# EAGLE board Adapter-TSSOP-48 (EAGLE 5.06)
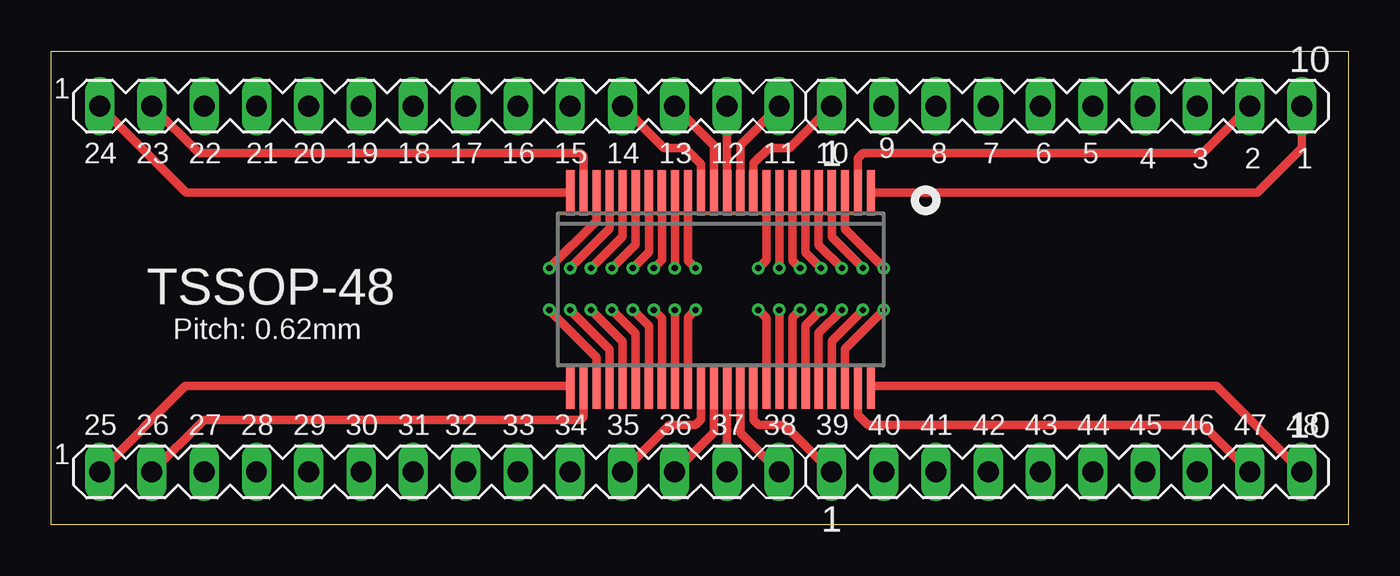
[diagram p0: board, top side]
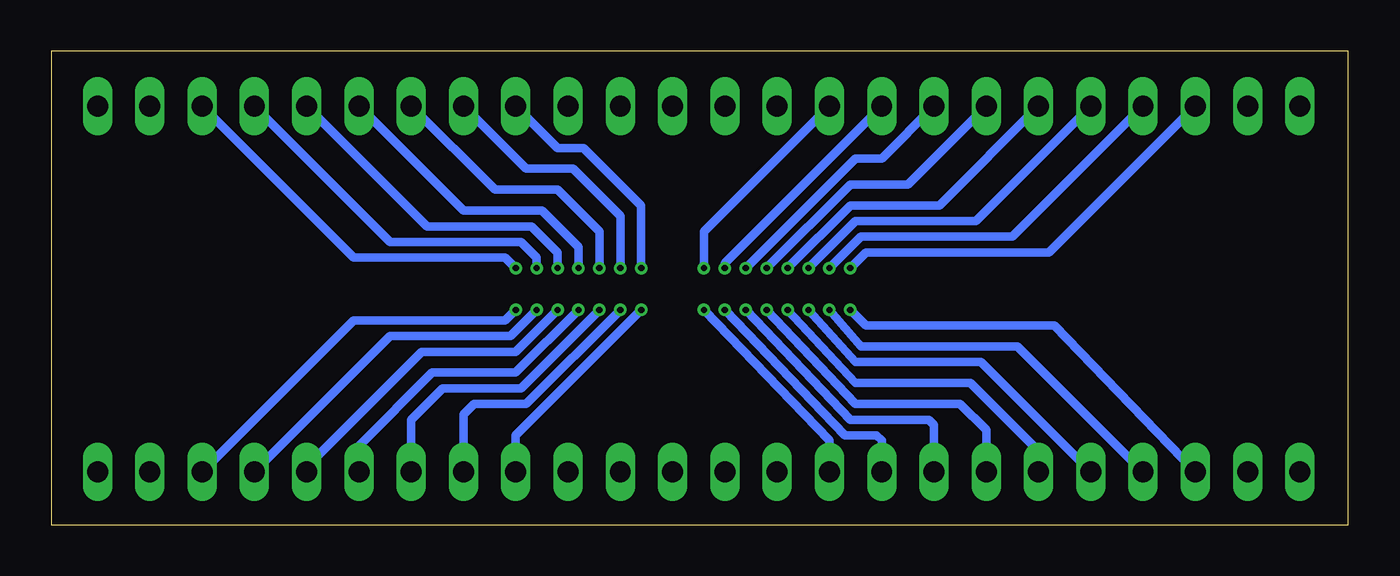
[diagram p1: board, bottom side, seen from below]

Size 63 x 23 mm. Coordinates in mm from the lower left corner, seen from the top.
Outline: 0,23 63,23 63,0 0,0 0,23
Copper layers (1*16): Top 0.035mm / dielectric 1.5mm / Bottom 0.035mm
Design rules "PCB-POOL *": minimum track width 8mil, minimum drill 12mil, track to track 8mil, track to pad 8mil, pad to pad 8mil, via to via 8mil, smd to smd 8mil, copper to edge 20mil, drill to drill 8mil, minimum pad ring 8mil, minimum via ring 6mil, stop-mask expansion 3mil, vias tented up to drill 0mil, thermal gap 8mil
Net classes: 0 default: width 0.2 mm

## Footprints (pad centres in the part's own frame; a part is rotated, then mirrored left to right if it is on the bottom)
SSO48 = smd 0.4 x 2.2: 1 -7.303,-4.7; 2 -6.668,-4.7; 3 -6.033,-4.7; 4 -5.398,-4.7; 5 -4.763,-4.7; 6 -4.128,-4.7; 7 -3.493,-4.7; 8 -2.858,-4.7; 9 -2.223,-4.7; 10 -1.588,-4.7; 11 -0.953,-4.7; 12 -0.318,-4.7; 13 0.318,-4.7; 14 0.953,-4.7; 15 1.588,-4.7; 16 2.223,-4.7; 17 2.858,-4.7; 18 3.493,-4.7; 19 4.128,-4.7; 20 4.763,-4.7; 21 5.398,-4.7; 22 6.033,-4.7; 23 6.668,-4.7; 24 7.303,-4.7; 25 7.303,4.7; 26 6.668,4.7; 27 6.033,4.7; 28 5.398,4.7; 29 4.763,4.7; 30 4.128,4.7; 31 3.493,4.7; 32 2.858,4.7; 33 2.223,4.7; 34 1.588,4.7; 35 0.953,4.7; 36 0.318,4.7; 37 -0.318,4.7; 38 -0.953,4.7; 39 -1.588,4.7; 40 -2.223,4.7; 41 -2.858,4.7; 42 -3.493,4.7; 43 -4.128,4.7; 44 -4.763,4.7; 45 -5.398,4.7; 46 -6.033,4.7; 47 -6.668,4.7; 48 -7.303,4.7
MA10-1 = drill 1.016 long: 1 -11.43,0; 2 -8.89,0; 3 -6.35,0; 4 -3.81,0; 5 -1.27,0; 6 1.27,0; 7 3.81,0; 8 6.35,0; 9 8.89,0; 10 11.43,0
MA14-1 = drill 1.016 long: 1 -15.24,0; 2 -12.7,0; 3 -10.16,0; 4 -7.62,0; 5 -5.08,0; 6 -2.54,0; 7 0,0; 8 2.54,0; 9 5.08,0; 10 7.62,0; 11 10.16,0; 12 12.7,0; 13 15.24,0; 14 17.78,0

## Placement (x,y rotation side)
E$1  [SSO48]  32.52,11.43 180 top
E$2  [MA10-1]  49.33,20.34 0 top
E$3  [MA14-1]  17.58,2.56 0 top
E$4  [MA14-1]  17.58,20.34 0 top
E$5  [MA10-1]  49.33,2.56 0 top

## Library data of the parts
E$1 = smd-ipc
E$2-E$5 = con-lstb

## Nets
S$1: E$1.10 E$2.1
S$2: E$1.9 E$2.2
S$3: E$1.8 E$2.3
S$4: E$1.7 E$2.4
S$5: E$1.6 E$2.5
S$6: E$1.5 E$2.6
S$7: E$1.4 E$2.7
S$8: E$1.3 E$2.8
S$9: E$1.2 E$2.9
S$10: E$1.1 E$2.10
S$11: E$1.39 E$5.1
S$12: E$1.40 E$5.2
S$13: E$1.24 E$4.1
S$14: E$1.41 E$5.3
S$15: E$1.42 E$5.4
S$16: E$1.43 E$5.5
S$17: E$1.23 E$4.2
S$18: E$1.22 E$4.3
S$19: E$1.21 E$4.4
S$20: E$1.20 E$4.5
S$21: E$1.19 E$4.6
S$22: E$1.18 E$4.7
S$23: E$1.17 E$4.8
S$24: E$1.16 E$4.9
S$25: E$1.15 E$4.10
S$26: E$1.14 E$4.11
S$27: E$1.13 E$4.12
S$28: E$1.12 E$4.13
S$29: E$1.11 E$4.14
S$30: E$1.25 E$3.1
S$31: E$1.26 E$3.2
S$32: E$1.27 E$3.3
S$33: E$1.28 E$3.4
S$34: E$1.29 E$3.5
S$35: E$1.30 E$3.6
S$36: E$1.31 E$3.7
S$37: E$1.32 E$3.8
S$38: E$1.33 E$3.9
S$39: E$1.34 E$3.10
S$40: E$1.35 E$3.11
S$41: E$1.36 E$3.12
S$42: E$1.37 E$3.13
S$43: E$1.38 E$3.14
S$44: E$1.44 E$5.6
S$45: E$1.45 E$5.7
S$46: E$1.46 E$5.8
S$47: E$1.47 E$5.9
S$48: E$1.48 E$5.10

## Tracks (layer width: path | path; a pad name or v marks a point on that pad's centre or on a via)
S$1
  Top 0.406: E$1.10 34.1,17.56 34.85,18.31 35.87,18.31 E$2.1
S$2  (via drill 0.3)
  Top 0.406: E$1.9 34.74,12.86 v34.34,12.47
  Bottom 0.406: v34.34,12.47 34.34,15.51 37.14,18.31 38.41,18.31 E$2.2
S$3  (via drill 0.3)
  Top 0.406: E$1.8 35.37,12.48 v35.36,12.47
  Bottom 0.406: v35.36,12.47 35.36,15.01 37.65,17.29 39.93,17.29 E$2.3
S$4  (via drill 0.3)
  Top 0.406: E$1.7 36.01,12.83 v36.38,12.47
  Bottom 0.406: v36.38,12.47 36.38,14.24 38.41,16.28 41.46,16.28 E$2.4
S$5  (via drill 0.3)
  Top 0.406: E$1.6 36.64,13.21 v37.39,12.47
  Bottom 0.406: v37.39,12.47 37.39,13.48 39.17,15.26 42.98,15.26 E$2.5
S$6  (via drill 0.3)
  Top 0.406: E$1.5 37.28,13.59 v38.41,12.47
  Bottom 0.406: v38.41,12.47 38.41,13.23 39.68,14.5 44.76,14.5 E$2.6
S$7  (via drill 0.3)
  Top 0.406: E$1.4 37.91,13.98 v39.42,12.47
  Bottom 0.406: v39.42,12.47 39.42,12.97 40.19,13.74 46.54,13.74 E$2.7
S$8  (via drill 0.3)
  Top 0.406: E$1.3 38.55,14.36 v40.44,12.47
  Bottom 0.406: v40.44,12.47 40.95,12.97 48.31,12.97 E$2.8
S$9
  Top 0.406: E$1.2 39.18,17.81 39.42,18.05 55.93,18.05 E$2.9
S$10
  Top 0.406: E$1.1 58.58,16.13 60.76,18.31 E$2.10
S$11
  Top 0.406: E$1.39 34.1,5.09 34.34,4.85 35.61,4.85 E$5.1
S$12  (via drill 0.3)
  Top 0.406: E$1.40 34.74,10.04 v34.34,10.43
  Bottom 0.406: E$5.2 40.44,4.34 v34.34,10.43
S$13
  Top 0.406: E$1.24 6.55,16.13 E$4.1
S$14  (via drill 0.3)
  Top 0.406: E$1.41 35.37,10.42 v35.36,10.43
  Bottom 0.406: E$5.3 42.98,5.35 42.47,5.86 39.93,5.86 v35.36,10.43
S$15  (via drill 0.3)
  Top 0.406: E$1.42 36.01,10.07 v36.38,10.43
  Bottom 0.406: E$5.4 45.52,5.1 44,6.62 40.19,6.62 v36.38,10.43
S$16  (via drill 0.3)
  Top 0.406: E$1.43 36.64,9.69 v37.39,10.43
  Bottom 0.406: E$5.5 48.06,3.83 44.5,7.39 40.44,7.39 v37.39,10.43
S$17
  Top 0.406: E$1.23 25.85,17.91 25.71,18.05 7.17,18.05 E$4.2
S$18  (via drill 0.3)
  Top 0.406: E$1.22 26.48,14.77 v24.18,12.47
  Bottom 0.406: v24.18,12.47 23.42,13.23 14.53,13.23 E$4.3
S$19  (via drill 0.3)
  Top 0.406: E$1.21 27.12,14.38 v25.2,12.47
  Bottom 0.406: v25.2,12.47 23.68,13.99 16.31,13.99 E$4.4
S$20  (via drill 0.3)
  Top 0.406: E$1.20 27.75,14 v26.22,12.47
  Bottom 0.406: v26.22,12.47 23.93,14.75 18.09,14.75 E$4.5
S$21  (via drill 0.3)
  Top 0.406: E$1.19 28.39,13.62 v27.23,12.47
  Bottom 0.406: v27.23,12.47 24.18,15.51 19.87,15.51 E$4.6
S$22  (via drill 0.3)
  Top 0.406: E$1.18 29.02,13.24 v28.25,12.47
  Bottom 0.406: v28.25,12.47 24.18,16.53 21.39,16.53 E$4.7
S$23  (via drill 0.3)
  Top 0.406: E$1.17 29.66,12.86 v29.26,12.47
  Bottom 0.406: v29.26,12.47 23.93,17.8 22.66,17.8 E$4.8
S$24  (via drill 0.3)
  Top 0.406: E$1.16 30.29,12.48 v30.28,12.47
  Bottom 0.406: v30.28,12.47 30.28,12.72 E$4.9
S$25  (via drill 0.3)
  Top 0.406: E$1.15 30.93,12.83 v31.3,12.47
  Bottom 0.406: v31.3,12.47 31.3,14.24 E$4.10
S$26
  Top 0.406: E$1.14 31.56,17.53 30.79,18.31 29.77,18.31 E$4.11
S$27
  Top 0.406: E$1.13 32.2,18.42 E$4.12
S$28
  Top 0.406: E$1.12 32.83,20.33 E$4.13
S$29
  Top 0.406: E$1.11 33.47,18.45 E$4.14
S$30
  Top 0.406: E$1.25 6.51,6.73 E$3.1
S$31
  Top 0.406: E$1.26 25.85,5.24 25.71,5.1 7.42,5.1 E$3.2
S$32  (via drill 0.3)
  Top 0.406: E$1.27 26.48,8.13 v24.18,10.43
  Bottom 0.406: v24.18,10.43 23.42,9.67 14.28,9.67 E$3.3
S$33  (via drill 0.3)
  Top 0.406: E$1.28 27.12,8.52 v25.2,10.43
  Bottom 0.406: v25.2,10.43 23.68,8.66 16.06,8.66 E$3.4
S$34  (via drill 0.3)
  Top 0.406: E$1.29 27.75,8.9 v26.22,10.43
  Bottom 0.406: v26.22,10.43 23.93,7.89 17.83,7.89 E$3.5
S$35  (via drill 0.3)
  Top 0.406: E$1.30 28.39,9.28 v27.23,10.43
  Bottom 0.406: E$3.6 15.04,3.58 18.34,6.88 23.93,6.88 v27.23,10.43
S$36  (via drill 0.3)
  Top 0.406: E$1.31 29.02,9.66 v28.25,10.43
  Bottom 0.406: E$3.7 17.58,4.59 18.85,5.86 23.93,5.86 v28.25,10.43
S$37  (via drill 0.3)
  Top 0.406: E$1.32 29.66,10.04 v29.26,10.43
  Bottom 0.406: E$3.8 20.12,4.85 20.37,5.1 24.18,5.1 v29.26,10.43
S$38  (via drill 0.3)
  Top 0.406: E$1.33 30.29,10.42 v30.28,10.43
  Bottom 0.406: E$3.9 22.66,4.08 22.91,4.34 24.44,4.34 v30.28,10.43
S$39  (via drill 0.3)
  Top 0.406: E$1.34 30.93,10.07 v31.3,10.43
  Bottom 0.406: E$3.10 25.2,4.08 v31.3,10.43
S$40
  Top 0.406: E$3.11 30.03,4.85 31.3,4.85 31.56,5.11 E$1.35
S$41
  Top 0.406: E$1.36 32.2,4.48 E$3.12
S$42
  Top 0.406: E$1.37 32.83,2.57 E$3.13
S$43
  Top 0.406: E$1.38 33.47,4.45 E$3.14
S$44  (via drill 0.3)
  Top 0.406: E$1.44 37.28,9.3 v38.41,10.43
  Bottom 0.406: E$5.6 50.6,2.81 45.01,8.4 40.44,8.4 v38.41,10.43
S$45  (via drill 0.3)
  Top 0.406: E$1.45 37.91,8.92 v39.42,10.43
  Bottom 0.406: v39.42,10.43 40.69,9.16 46.54,9.16 E$5.7
S$46  (via drill 0.3)
  Top 0.406: E$1.46 38.55,8.54 v40.44,10.43
  Bottom 0.406: v40.44,10.43 40.95,9.93 48.31,9.93 E$5.8
S$47
  Top 0.406: E$1.47 39.18,5.34 39.68,4.85 55.93,4.85 E$5.9
S$48
  Top 0.406: E$1.48 56.59,6.73 E$5.10

## Text on the board
tNames: 24 | 23 | 22 | 21 | 20 | 19 | 18 | 17 | 16 | 15 | 14 | 13 | 12 | 11 | 10 | 9 | 8 | 7 | 6 | 5 | 4 | 3 | 2 | 1 | TSSOP-48 | Pitch: 0.62mm | 25 | 26 | 27 | 28 | 29 | 30 | 31 | 32 | 33 | 34 | 35 | 36 | 37 | 38 | 39 | 40 | 41 | 42 | 43 | 44 | 45 | 46 | 47 | 48